# Altium PCB layout.PcbDoc
Units mil, origin at the board's own origin, x right, y up, seen from the top; angles counter-clockwise.
Board outline 2086.61 x 2677.17 mil, 2 copper layers (Top Layer, Bottom Layer); 22 components, 25 nets, 105 pads, 1 vias.
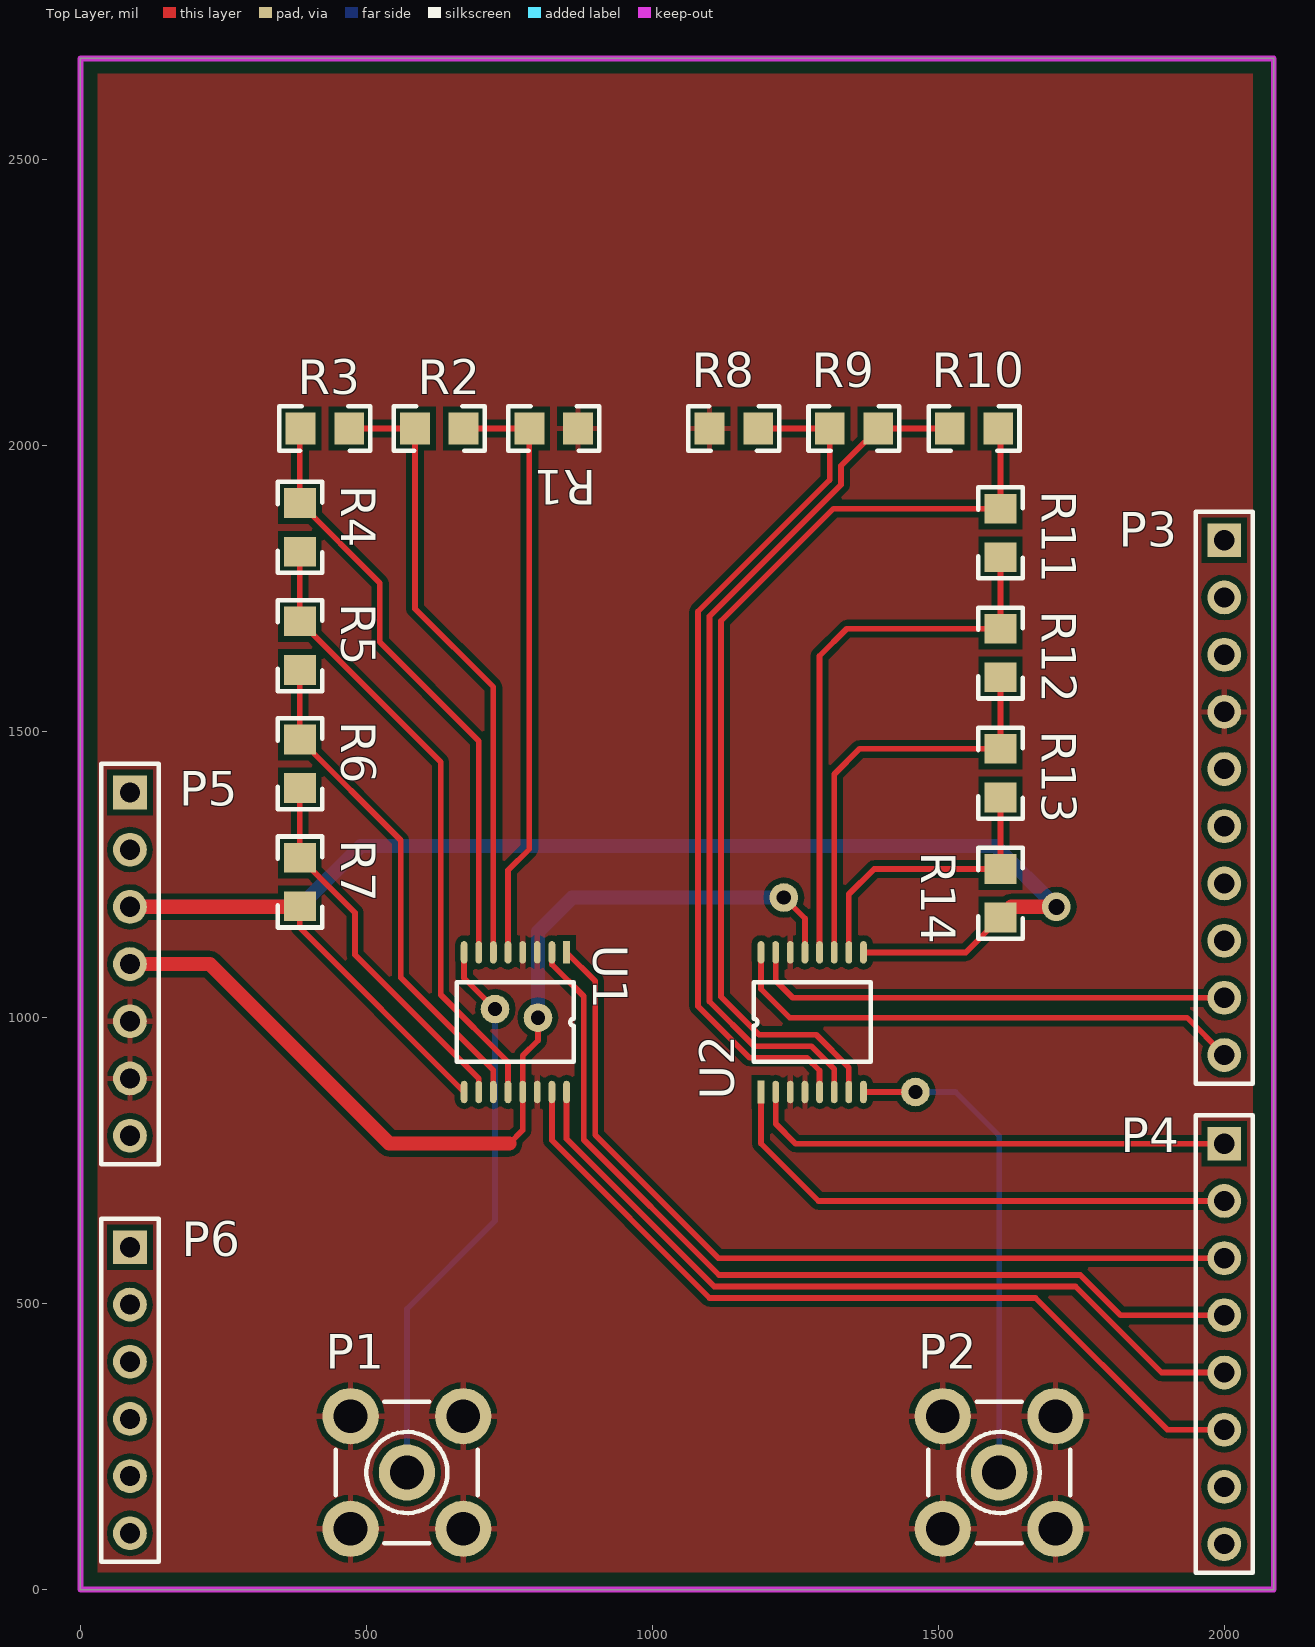
[diagram p0: Top Layer view]
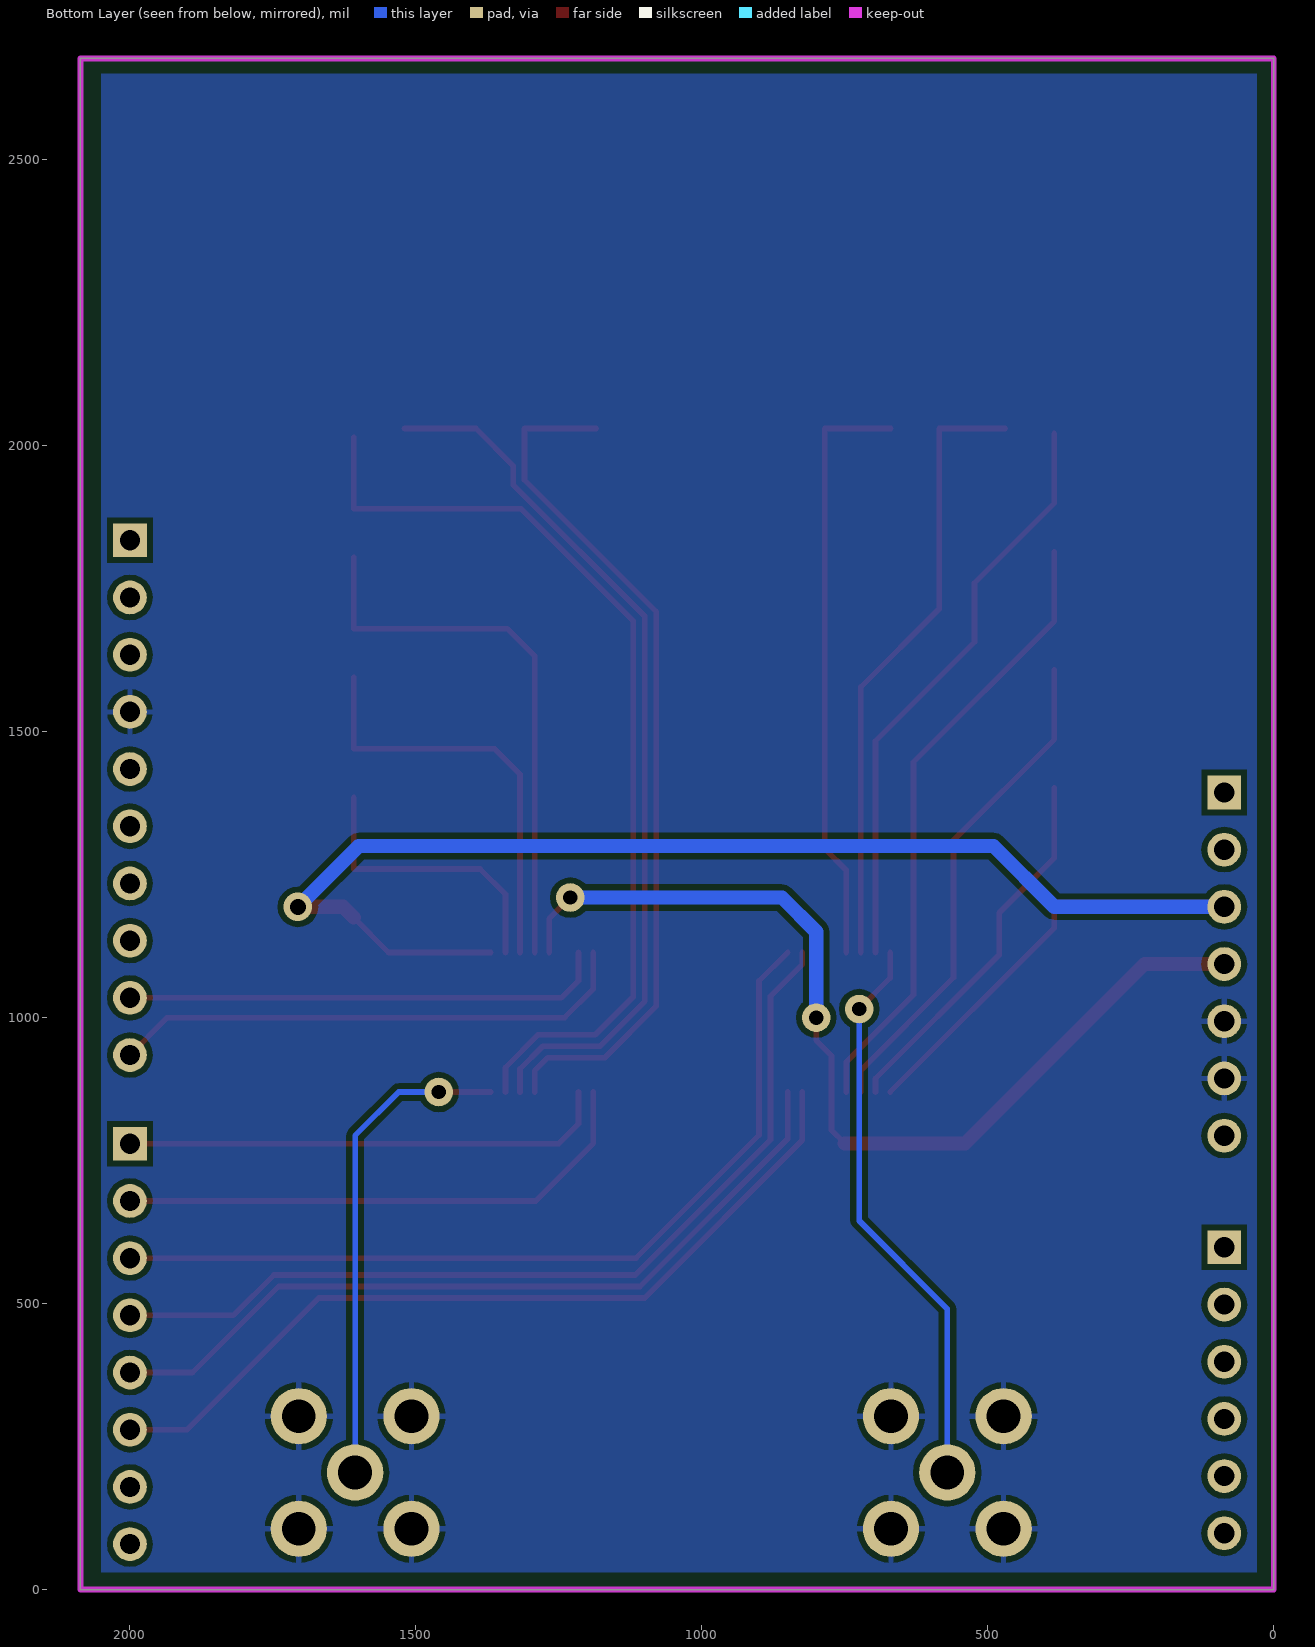
[diagram p1: Bottom Layer view, seen from below]

## Layer stack, top to bottom
Top Layer: signal copper 1.4
Dielectric: dielectric 12.6, FR-4, Dk 4.8
Bottom Layer: signal copper 1.4

## Board outline
0,0 2086.61,0 2086.61,2677.17 0,2677.17 0,0

## Design rules (kind name [scope] priority, off if disabled: settings)
Clearance [All] p1: gap=10
MinimumSolderMaskSliver [All] p1: minsoldermaskwidth=0
PolygonConnect [All] p1: connectstyle=Relief reliefconductorwidth=10 reliefentries=4 polygonreliefangle="90 Angle" airgapwidth=10
RoutingVias [All] p1: holewidth=28 width=50 viastyle="Through Hole" minholewidth=28 minwidth=50 maxholewidth=28 maxwidth=50
SilkToSolderMaskClearance [IsPad] p1: minsilkscreentomaskgap=0 clearancetoexposedcopper=TRUE
SolderMaskExpansion [All] p1: expansion=4
Width [All] p1: maxlimit=30 minlimit=10 preferedwidth=10 minimp=50.000000 maximp=50.000000 favimp=50.000000
26 further rules are at their usual default settings.

## Components (designator, comment, footprint, x,y, rotation, side; value= is the part's Value field where it differs from the comment)
P1 "SMB" SMB_V-RJ45 570.87,204.72 r0 top
P2 "SMB" SMB_V-RJ45 1606.3,204.72 r0 top
P3 "Header 10" HDR1X10 2000,1834.65 r270 top
P4 "Header 8" HDR1X8 2000,779.53 r270 top
P5 "Header 7" HDR1X7 86.61,1393.7 r270 top
P6 "Header 6" HDR1X6 86.61,598.43 r270 top
R1 "Res2" 0805R 870,2030 r180 top
R2 "Res2" 0805R 670,2030 r180 top
R3 "Res2" 0805R 470,2030 r180 top
R4 "Res2" 0805R 383.7,1899.69 r270 top
R5 "Res2" 0805R 383.7,1693.02 r270 top
R6 "Res2" 0805R 383.7,1486.35 r270 top
R7 "Res2" 0805R 383.7,1279.69 r270 top
R8 "Res2" 0805R 1100,2030 r0 top
R9 "Res2" 0805R 1310,2030 r0 top
R10 "Res2" 0805R 1520,2030 r0 top
R11 "Res2" 0805R 1608.74,1890 r270 top
R12 "Res2" 0805R 1608.74,1680 r270 top
R13 "Res2" 0805R 1608.74,1470 r270 top
R14 "Res2" 0805R 1608.74,1260 r270 top
U1 "ADG708" TSSOP16 850,1114.1 r270 top
U2 "ADG708" TSSOP16 1190,870 r90 top

## Footprints (in the part's own frame and the unit in brackets; to place one, negate y for a bottom-side part, rotate by r counter-clockwise, add the part's x,y. Pads: shape width x height; smd on the part's side, far side on the other; paste and mask are expansions set on the pad)
0805R [mil]
  rect 52x56 smd: 1(0,0) 2(85,0)
  silkscreen extent -37,-39 122,39
HDR1X6 [mm] "Connector; Header; 6 Position"
  rect 1.5x1.5 hole 0.9: 1(0,0)
  round 1.5 hole 0.9: 2(2.54,0) 3(5.08,0) 4(7.62,0) 5(10.16,0) 6(12.7,0)
  silkscreen extent -1.27,-1.27 13.97,1.27
HDR1X7 [mm] "Connector; Header; 7 Position"
  rect 1.5x1.5 hole 0.9: 1(0,0)
  round 1.5 hole 0.9: 2(2.54,0) 3(5.08,0) 4(7.62,0) 5(10.16,0) 6(12.7,0) 7(15.24,0)
  silkscreen extent -1.27,-1.27 16.51,1.27
HDR1X8 [mm] "Connector; Header; 8 Position"
  rect 1.5x1.5 hole 0.9: 1(0,0)
  round 1.5 hole 0.9: 2(2.54,0) 3(5.08,0) 4(7.62,0) 5(10.16,0) 6(12.7,0) 7(15.24,0) 8(17.78,0)
  silkscreen extent -1.27,-1.27 19.05,1.27
HDR1X10 [mm] "Connector; Header; 10 Position"
  rect 1.5x1.5 hole 0.9: 1(0,0)
  round 1.5 hole 0.9: 2(2.54,0) 3(5.08,0) 4(7.62,0) 5(10.16,0) 6(12.7,0) 7(15.24,0) 8(17.78,0) 9(20.32,0) 10(22.86,0)
  silkscreen extent -1.27,-1.27 24.13,1.27
SMB_V-RJ45 [mm] "Connector; SMB Straight"
  round 2.5 hole 1.5: 1(0,0) 2(-2.5,-2.5) 2(-2.5,2.5) 2(2.5,-2.5) 2(2.5,2.5)
  silkscreen extent -3.15,-3.15 3.15,3.15
TSSOP16 [mm]
  rect 1x0.3 smd: 1(0,0)
  oval 1x0.3 smd: 2(0,-0.65) 3(0,-1.3) 4(0,-1.95) 5(0,-2.6) 6(0,-3.25) 7(0,-3.9) 8(0,-4.55) 9(6.2,-4.55) 10(6.2,-3.9) 11(6.2,-3.25) 12(6.2,-2.6) 13(6.2,-1.95) 14(6.2,-1.3) 15(6.2,-0.65) 16(6.2,0)
  silkscreen extent 1.33,-4.87 4.86,0.33

## Part data
P1 P2: "SMB Straight Connector"
P3: "Header, 10-Pin"
P4: "Header, 8-Pin"
P5: "Header, 7-Pin"
P6: "Header, 6-Pin"
R1 R2 R3 R4 R5 R6 R7 R8 R9 R10 R11 R12 R13 R14: "Resistor"

## Free pads (board coordinates)
  round 50 hole 25: 3(724.96,1015.04) 4(1460,870) 5(1230,1210) 6(800,1000)

## Via types
v1: diameter 50, hole 28, Top Layer to Bottom Layer, 1 vias

## Nets (pads, with @x,y where several pads share a name; then routed paths per layer and width w, separated by ;. In a path a pad name is that pad's centre, name@x,y a point inside that pad or via, vN(x,y) a via of type N, cw(c..) or ccw(c..) an arc to the next point about the centre after c; other vN are vias at no path point)
5V0: P5.4 pad.5 pad.6 U1.13 U2.13 | length 1750
  Top Layer w10: 750,780 773.23,803.23 U1.13 773.23,933.23 800,960 pad.6 ; pad.5 1266.77,1173.23 U2.13
  Top Layer w25: P5.4 226.3,1093.7 540,780 750,780
  Bottom Layer w25: pad.6 800,1150 860,1210 pad.5
A0_0: P4.3 U1.1 | length 1529.1
  Top Layer w10: U1.1 900,1064.09 900,794.85 1115.32,579.53 P4.3
A0_1: P4.5 U1.16 | length 1401
  Top Layer w10: U1.16 850,788.29 1108.28,530 1740,530 1890.47,379.53 P4.5
A0_2: P4.6 U1.15 | length 1469.6
  Top Layer w10: U1.15 824.41,785.59 1100,510 1670,510 1900.47,279.53 P4.6
A1_0: P4.2 U2.1 | length 941.6
  Top Layer w10: U2.1 1190,780 1290.47,679.53 P4.2
A1_1: P3.10 U2.16 | length 921.9
  Top Layer w10: U2.16 1190,1050 1240,1000 1934.65,1000 P3.10
A1_2: P3.9 U2.15 | length 846.4
  Top Layer w10: U2.15 1215.59,1064.41 1245.35,1034.65 P3.9
ADDR0: P1.1 pad.3 U1.8 | length 995.6
  Top Layer w10: U1.8 670.87,1069.13 pad.3
  Bottom Layer w10: P1.1 570.87,490.87 724.96,644.96 pad.3
ADDR0_0: P1.2 P2.2 P3.4 P5.5 P5.6 R1.1 R8.1 U1.3 U1.4 U1.14 U2.3 U2.4 U2.14
ADDR0_1: R1.2 R2.1 U1.5 | length 1046.4
  Top Layer w10: R2.1 R1.2 785,1295 747.64,1257.64 U1.5
ADDR0_2: R2.2 R3.1 U1.6 | length 1087.7
  Top Layer w10: R3.1 R2.2 585,1715 722.05,1577.95 U1.6
ADDR0_3: R3.2 R4.1 U1.7 | length 1036.8
  Top Layer w10: R3.2@383.7,2021.35 R4.1 523.39,1760 523.39,1656.61 696.46,1483.54 U1.7
ADDR0_4: R4.2 R5.1 U1.12 | length 1095.4
  Top Layer w10: R4.2 R5.1 630,1446.72 630,1040 747.64,922.36 U1.12
ADDR0_5: R5.2 R6.1 U1.11 | length 878.2
  Top Layer w10: R5.2 R6.1 560,1310.05 560,1070 722.05,907.95 U1.11
ADDR0_6: R6.2 R7.1 U1.10 | length 660.9
  Top Layer w10: R6.2 R7.1 480,1183.39 480,1110 696.46,893.54 U1.10
ADDR0_7: P5.3 R7.2 R14.2 U1.9 U2.9 | length 2817.6
  Top Layer w10: R7.2 383.7,1157.17 U1.9 ; U2.9 1547.83,1114.09 R14.2
  Top Layer w25: P5.3 R7.2@382.71,1193.7 ; R14.2 1627.44,1193.7 v1(1706.3,1193.7)
  Bottom Layer w25: P5.3 383.7,1193.7 490,1300 1600,1300 v1(1706.3,1193.7)
ADDR1: P2.1 pad.4 U2.8 | length 857.7
  Top Layer w10: U2.8 pad.4
  Bottom Layer w10: pad.4 1530,870 1606.3,793.7 P2.1
ADDR1_1: R8.2 R9.1 U2.5 | length 1526.8
  Top Layer w10: R8.2 R9.1 1310,1940 1080,1710 1080,1020 1170,930 1270,930 1292.36,907.64 U2.5
ADDR1_2: R9.2 R10.1 U2.6 | length 1556
  Top Layer w10: U2.6 1317.95,910.33 1278.28,950 1178.28,950 1100,1028.28 1100,1701.72 1330,1931.72 1330,1965 R9.2 R10.1
ADDR1_3: R10.2 R11.1 U2.7 | length 1669.8
  Top Layer w10: U2.7 1343.54,913.03 1286.57,970 1186.57,970 1120,1036.57 1120,1693.43 1316.57,1890 R11.1 R10.2@1608.74,2015
ADDR1_4: R11.2 R12.1 U2.12 | length 979.4
  Top Layer w10: U2.12 1292.36,1632.36 1340,1680 R12.1 R11.2
ADDR1_5: R12.2 R13.1 U2.11 | length 745.7
  Top Layer w10: U2.11 1317.95,1425.59 1362.36,1470 R13.1 R12.2
ADDR1_6: R13.2 R14.1 U2.10 | length 510.1
  Top Layer w10: U2.10 1343.54,1215.59 1387.95,1260 R14.1 R13.2
EN0: P4.4 U1.2 | length 1597.7
  Top Layer w10: U1.2 824.41,1092.88 880,1037.29 880,786.57 1116.57,550 1748.28,550 1818.76,479.53 P4.4
EN1: P4.1 U2.2 | length 854.4
  Top Layer w10: U2.2 1215.59,814.41 1250.47,779.53 P4.1
pads on no net: P3.1 P3.2 P3.3 P3.5 P3.6 P3.7 P3.8 P4.7 P4.8 P5.1 P5.2 P5.7 P6.1 P6.2 P6.3 P6.4 P6.5 P6.6

## Polygon pours and split planes (outlines as drawn)
ADDR0_0 on Top Layer "Top Layer-GND" (solid, pour order 4): 30,30 2050,30 2050,2650 30,2650
ADDR0_0 on Bottom Layer "Bottom Layer-GND" (solid, pour order 6): 30,30 2050,30 2050,2650 30,2650

## Keep-outs
Keep-Out Layer:
  the board outline again, w10